# EAGLE board BPv4-PassiveLCDv1 (EAGLE 5.09)
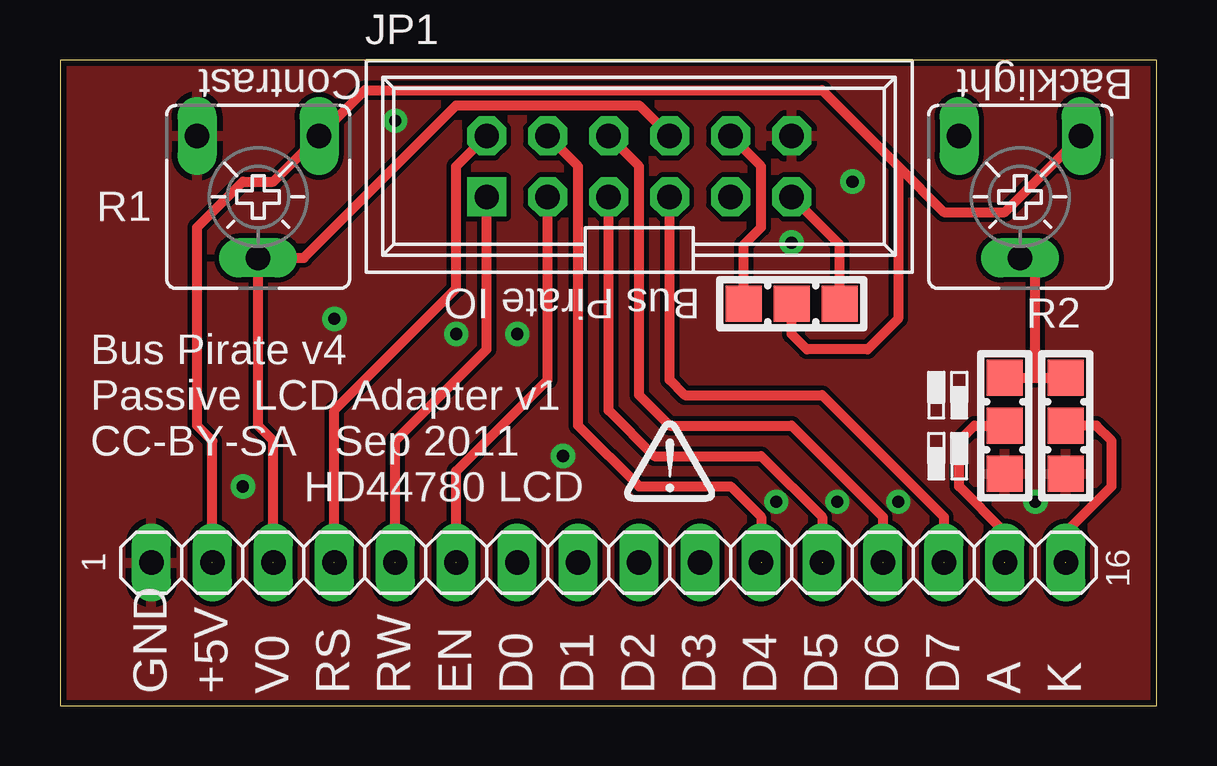
[diagram p0: board, top side]
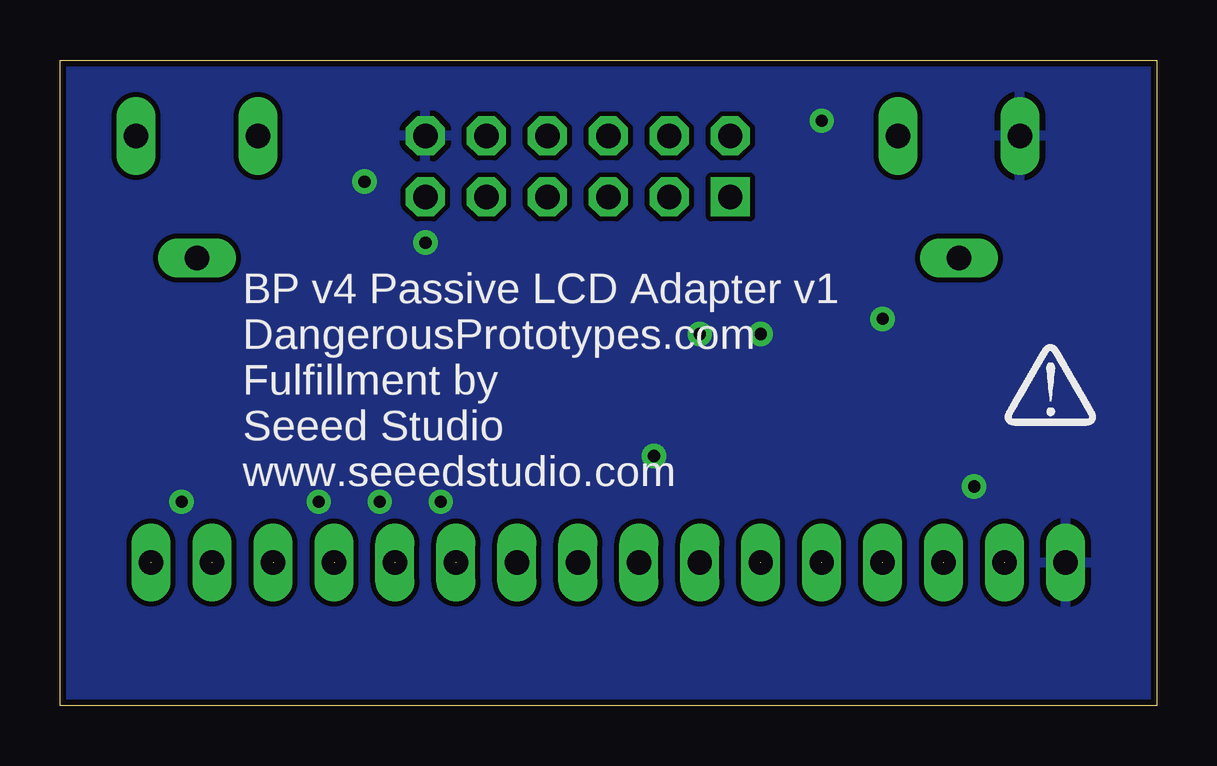
[diagram p1: board, bottom side, seen from below]

Size 45.71 x 26.91 mm. Coordinates in mm from the lower left corner, seen from the top.
Outline: 0,0 45.71,0 45.71,26.91 0,26.91 0,0
Copper layers (1*16): Top 0.035mm / dielectric 1.5mm / Bottom 0.035mm
Design rules "SparkFun": minimum track width 8mil, minimum drill 20mil, track to track 8mil, track to pad 8mil, pad to pad 8mil, via to via 8mil, smd to smd 8mil, copper to edge 10mil, drill to drill 8mil, minimum pad ring 12mil, minimum via ring 10mil, stop-mask expansion 4mil, vias tented up to drill 25mil, thermal gap 10mil

## Footprints (pad centres in the part's own frame; a part is rotated, then mirrored left to right if it is on the bottom)
PINSHRD_PTH_2X06 = drill 1.016 square: 1 -6.35,-1.27 | drill 1.016 octagon: 2 -6.35,1.27; 3 -3.81,-1.27; 4 -3.81,1.27; 5 -1.27,-1.27; 6 -1.27,1.27; 7 1.27,-1.27; 8 1.27,1.27; 9 3.81,-1.27; 10 3.81,1.27; 11 6.35,-1.27; 12 6.35,1.27
1X16 = drill 1.016 long: 1 -19.05,0; 2 -16.51,0; 3 -13.97,0; 4 -11.43,0; 5 -8.89,0; 6 -6.35,0; 7 -3.81,0; 8 -1.27,0; 9 1.27,0; 10 3.81,0; 11 6.35,0; 12 8.89,0; 13 11.43,0; 14 13.97,0; 15 16.51,0; 16 19.05,0
CA6V = drill 1.016 long: A -2.54,-2.54; E 2.54,-2.54; S 0,2.54
JP3_0805 = smd 1.5 x 1.5: 1 -2,0; 2 0,0; 3 2,0

## Placement (x,y rotation side)
JP1  PINSHRD-PTH-2X06  [PINSHRD_PTH_2X06]  24.13,22.48 0 top
LCD  [1X16]  22.86,5.97 0 top
R1  10K  [CA6V]  8.26,21.21 180 top
R2  100R  [CA6V]  40,21.21 180 top
SJ1  JUMP3  [JP3_0805]  30.48,16.76 0 top
SJ2A  JUMP3  [JP3_0805]  39.37,11.68 90 top
SJ2B  JUMP3  [JP3_0805]  41.91,11.68 270 top
U$1  [DP_LOGO]  25.4,9.14 0 top
U$2  [DP_LOGO]  4.45,12.32 0 bottom

## Library data of the parts
JP1 SJ1 SJ2A SJ2B U$1 U$2 = dp_devices
LCD = pinhead
R1 R2 = pot

## Nets
A: LCD.15 SJ2A.2
ADC: JP1.8 LCD.3 R1.S
AUX0: JP1.5 LCD.12
AUX1: JP1.6 LCD.13
AUX2: JP1.7 LCD.14
CLOCK: JP1.2 LCD.4
CS: JP1.4 LCD.11
GND: JP1.12 LCD.1 R1.E SJ2A.1 SJ2B.3
K: LCD.16 SJ2B.2
MISO: JP1.3 LCD.6
MOSI: JP1.1 LCD.5
N$2: R2.S SJ2A.3 SJ2B.1
SWV33: JP1.10 SJ1.1
SWV50: JP1.11 SJ1.3
VCC: LCD.2 R1.A R2.A SJ1.2
VEXTERN: JP1.9

## Tracks (layer width: path | path; a pad name or v marks a point on that pad's centre or on a via)
A  (1 unrouted)
  Top 0.406: SJ2A.2 38.1,11.68 37.46,11.05 37.46,9.14 39.37,7.24 39.37,5.98
ADC  (1 unrouted)
  Top 0.406: 8.89,5.98 8.89,11.05 8.26,11.68 R1.S 10.16,18.67 16.51,25.02 24.13,25.02 JP1.8
AUX0  (1 unrouted)
  Top 0.406: JP1.5 22.86,12.32 24.77,10.41 29.21,10.41 31.75,7.87 31.75,5.98
AUX1  (1 unrouted)
  Top 0.406: JP1.6 24.13,22.48 24.13,12.95 25.4,11.68 30.48,11.68 34.29,7.87 34.29,5.98
AUX2  (1 unrouted)
  Top 0.406: JP1.7 25.4,13.59 26.03,12.95 31.75,12.95 36.83,7.87 36.83,5.98
CLOCK  (1 unrouted)
  Top 0.406: JP1.2 16.51,22.48 16.51,17.4 11.43,12.32 11.43,5.98
CS  (1 unrouted)
  Top 0.406: JP1.4 21.59,22.48 21.59,11.68 24.13,9.14 27.94,9.14 29.21,7.87 29.21,5.98
GND  (via drill 0.51)
  other vias: 7.62,9.14 16.51,15.49 19.05,15.49 29.84,8.51 32.38,8.51 34.92,8.51 20.95,10.41 11.43,16.13 13.97,24.38 40.64,8.51 30.48,19.3 33.02,21.84
  pour Bottom: 0,26.92 45.72,26.92 45.72,0 0,0
  pour Top: 0,26.92 45.72,26.92 45.72,0 0,0
K  (1 unrouted)
  Top 0.406: SJ2B.2 43.18,11.68 43.81,11.05 43.81,9.14 41.91,7.24 41.91,5.98
MISO  (1 unrouted)
  Top 0.406: JP1.3 20.32,13.59 16.51,9.78 16.51,5.98
MOSI  (1 unrouted)
  Top 0.406: JP1.1 17.78,14.86 13.97,11.05 13.97,5.98
N$2
  Top 0.406: SJ2A.3 40.64,13.68 | 40.64,13.68 SJ2B.1 | R2.S 40.64,18.03 40.64,13.68
SWV33
  Top 0.406: SJ1.1 28.48,19.21 29.21,19.94 29.21,22.48 JP1.10
SWV50
  Top 0.406: SJ1.3 32.48,19.21 JP1.11
VCC  (1 unrouted)
  Top 0.406: 6.35,5.98 6.35,11.05 5.71,11.68 5.71,19.94 7.62,21.84 8.89,21.84 R1.A 12.7,25.65 31.75,25.65 34.92,22.48 | R2.A 39.37,20.57 36.83,20.57 34.92,22.48 | SJ1.2 30.48,15.49 31.12,14.86 33.66,14.86 34.92,16.13 34.92,22.48

## Text on the board
tNames: Contrast | Backlight | Bus Pirate IO | Bus Pirate v4 | Passive LCD Adapter v1 | CC-BY-SA | Sep 2011 | HD44780 LCD | 1 | 16 | GND | +5V | V0 | RS | RW | EN | D0 | D1 | D2 | D3 | D4 | D5 | D6 | D7 | A | K
bNames: BP v4 Passive LCD Adapter v1 | DangerousPrototypes.com | Fulfillment by | Seeed Studio | www.seeedstudio.com